# Altium PCB stm32f103.PcbDoc (part 2 of 2)
Units mm, origin at the board's own origin, x right, y up, seen from the top; angles counter-clockwise.
Board outline 73.39 x 86.21 mm, 2 copper layers (Top Layer, Bottom Layer); 96 components, 127 nets, 522 pads, 347 vias.
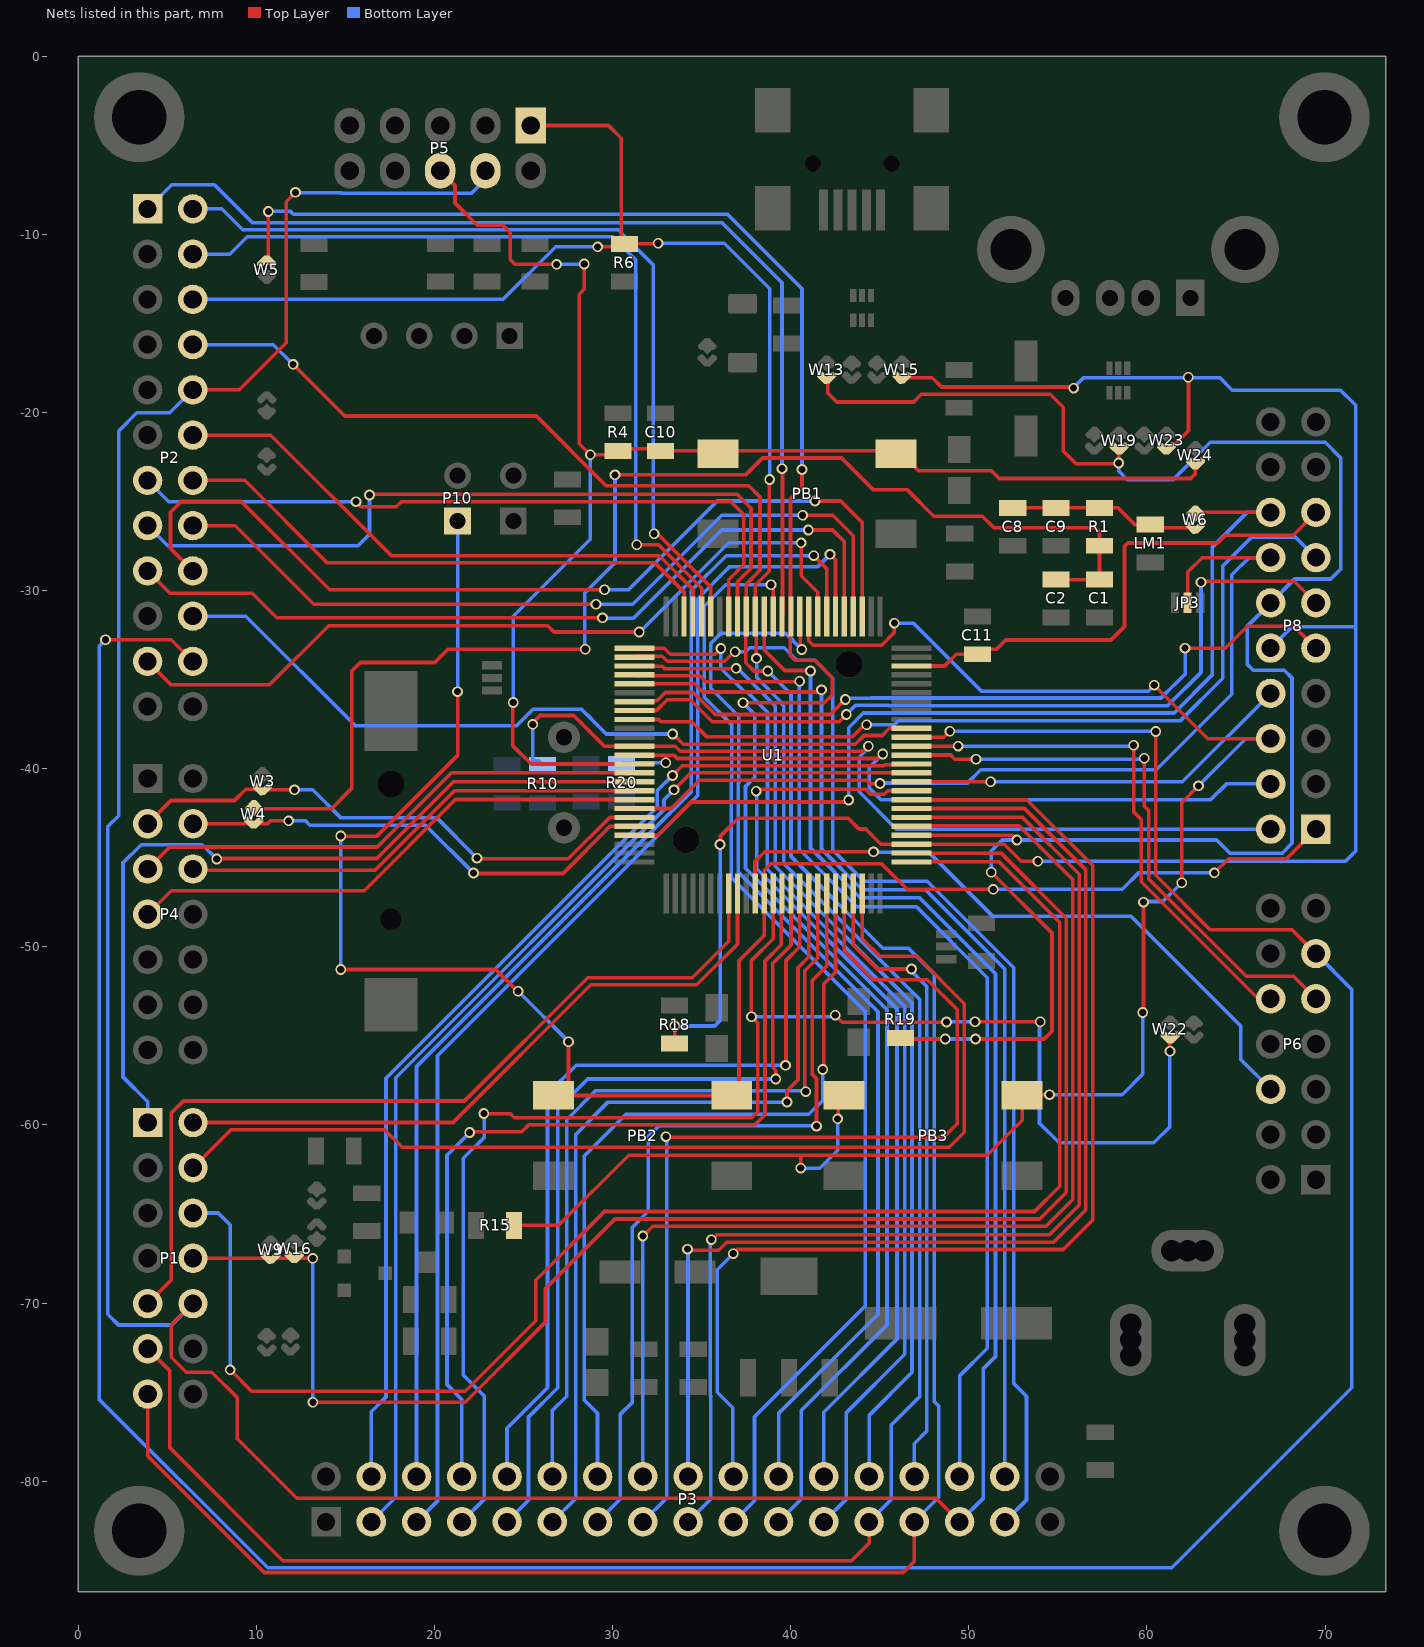
[diagram p2: the nets of this part, all layers, seen from the top]

## Via types
v1: diameter 0.6, hole 0.4, Top Layer to Bottom Layer, tented both sides, 320 vias
v2: diameter 0.6, hole 0.4, Top Layer to Bottom Layer, 27 vias

## Nets (pads, with @x,y where several pads share a name; then routed paths per layer and width w, separated by ;. In a path a pad name is that pad's centre, name@x,y a point inside that pad or via, vN(x,y) a via of type N, cw(c..) or ccw(c..) an arc to the next point about the centre after c; other vN are vias at no path point) (continued)
PB1: P6.6 U1.36 | length 37.6
  Top Layer w0.203: U1.36@37.994,-47.007 37.994,-45.214 38.54,-44.668 v1(44.643,-44.668)
  Bottom Layer w0.203: v1(44.643,-44.668) 44.674,-44.699 47.761,-44.699 51.353,-48.292 59.113,-48.292 65.254,-54.432 65.254,-56.308 P6.6@66.942,-57.996
PB2: P8.1 P10.1 PB2.1 PB2.2 U1.37 | length 102.6
  Top Layer w0.203: v2(14.746,-51.272) 23.446,-51.272 v1@24.683,-52.509 ; v2(14.746,-43.783) 16.773,-43.783 21.301,-39.255 v2(21.301,-35.676) ; PB2.1@26.692,-58.342 PB2.2@36.692,-58.342 37.158,-57.876 37.099,-57.817 37.099,-50.779 38.515,-49.363 U1.37@38.515,-47.011 38.515,-45.703 38.881,-45.337 45.101,-45.337 46.539,-46.775 51.353,-46.775 51.367,-46.761 v1(51.367,-46.775) ; PB2.1@27.527,-57.819 v1(27.527,-55.324) ; v1(63.783,-45.848) 64.582,-45.049 67.827,-45.049 P8.1@69.482,-43.394
  Bottom Layer w0.203: v2(14.746,-51.272) v2(14.746,-43.783) ; v2(21.301,-35.676) P10.1@21.301,-26.093 ; v1(24.702,-52.49) 27.527,-55.315 v1(27.527,-55.324) ; v1(51.367,-46.775) 58.611,-46.775 59.554,-45.832 63.767,-45.832 v1(63.783,-45.848)
PB3: P1.10 P2.10 P3.29 P5.4 U1.89 | length 199.7
  Top Layer w0.203: P2.10@6.439,-18.736 9.045,-18.736 11.687,-16.094 11.687,-8.17 v2(12.207,-7.65) ; P1.10@6.449,-70.022 5.237,-71.234 5.237,-73.037 6.071,-73.871 7.5,-73.871 8.93,-75.301 8.93,-77.608 12.275,-80.953 48.158,-80.953 P3.29@49.479,-82.274 ; U1.89@38.515,-31.461 38.515,-33.336 39.669,-34.49 41.082,-34.49 v1(41.11,-34.518)
  Bottom Layer w0.203: P2.10@6.439,-18.736 5.147,-20.028 3.299,-20.028 2.277,-21.05 2.277,-42.634 1.664,-43.247 1.664,-70.627 2.264,-71.227 5.244,-71.227 P1.10@6.449,-70.022 ; v2@12.207,-7.681 14.761,-7.681 14.785,-7.706 22.087,-7.706 22.868,-6.925 P5.4@22.868,-6.439 ; v1(41.11,-34.518) 41.11,-44.451 43.911,-47.252 47.232,-47.252 51.495,-51.515 51.495,-72.994 50.818,-73.671 50.818,-80.935 P3.29@49.479,-82.274
PB4: P1.11 P2.6 P3.25 P5.1 R6.1 U1.90 | length 170.1
  Top Layer w0.203: P1.11@3.909,-72.562 5.155,-73.808 5.155,-78.124 11.49,-84.459 43.412,-84.459 44.399,-83.472 P3.25@44.399,-82.274 ; P5.1@25.408,-3.899 29.768,-3.899 30.486,-4.617 R6.1@30.486,-10.357 ; v1(29.161,-10.706) 30.137,-10.706 R6.1@30.486,-10.357 ; v1(32.558,-10.508) 32.558,-10.539 R6.1@30.671,-10.539 30.489,-10.357 R6.1@30.486,-10.357 ; v1(38.085,-33.809) 38.058,-33.782 38.058,-31.504 U1.90@38.015,-31.461 38.015,-29.703 38.802,-28.916 38.802,-23.771 v1(38.82,-23.771)
  Bottom Layer w0.203: P2.6@6.439,-13.656 23.855,-13.656 26.805,-10.706 v1(29.161,-10.706) ; v1(32.558,-10.508) 36.27,-10.508 38.82,-13.058 v1(38.82,-23.771) ; v1(38.085,-33.809) 38.085,-34.87 39.534,-36.319 39.534,-36.396 39.607,-36.469 39.607,-45.322 47.239,-52.954 47.239,-75.241 45.634,-76.846 45.634,-81.039 P3.25@44.399,-82.274
PB5: P1.13 P2.8 P3.27 U1.91 | length 151.3
  Top Layer w0.203: P1.13@3.909,-75.102 3.909,-78.576 10.453,-85.12 46.321,-85.12 46.939,-84.502 P3.27@46.939,-82.274 ; v1(12.069,-17.303) 14.97,-20.204 25.726,-20.204 29.635,-24.113 37.645,-24.113 38.28,-24.748 38.28,-28.868 37.515,-29.633 U1.91@37.515,-31.461 37.483,-31.493 37.483,-34.058 37.94,-34.515 v1(38.713,-34.515)
  Bottom Layer w0.203: P2.8@6.439,-16.196 10.962,-16.196 v1(12.069,-17.303) ; v1(38.713,-34.515) 40.014,-35.816 40.014,-44.929 45.162,-50.077 46.613,-50.077 48.055,-51.519 48.055,-75.519 48.312,-75.776 48.312,-80.901 P3.27@46.939,-82.274
PB6: P2.15 U1.92 | length 43.5
  Top Layer w0.203: v1@16.358,-24.605 36.994,-24.605 37.771,-25.382 37.771,-28.753 37.015,-29.509 U1.92@37.015,-31.461
  Bottom Layer w0.203: P2.15@3.899,-26.356 5.032,-27.489 15.715,-27.489 16.358,-26.846 v1(16.358,-24.637)
PB7: P2.13 U1.93 | length 40.6
  Top Layer w0.203: v1(15.599,-25.01) 15.882,-25.293 17.853,-25.293 18.136,-25.01 36.651,-25.01 37.368,-25.727 37.368,-28.54 36.515,-29.393 U1.93@36.515,-31.461
  Bottom Layer w0.203: P2.13@3.899,-23.816 5.093,-25.01 v1(15.599,-25.01)
PB8: P2.2 U1.95 | length 48.1
  Top Layer w0.203: v1(32.333,-26.811) 32.528,-26.811 35.515,-29.798 U1.95@35.515,-31.461
  Bottom Layer w0.203: P2.2@6.439,-8.576 8.064,-8.576 9.242,-9.754 30.316,-9.754 32.287,-11.725 v1@32.287,-26.588
PB9: P2.4 U1.96 | length 48.1
  Top Layer w0.203: v1(31.356,-27.43) 32.577,-27.43 35.015,-29.868 U1.96@35.015,-31.461
  Bottom Layer w0.203: P2.4@6.439,-11.116 8.517,-11.116 9.494,-10.139 29.996,-10.139 31.293,-11.436 31.293,-27.367 v1(31.356,-27.43)
PB10: P3.28 U1.47 | length 35.9
  Top Layer w0.203: U1.47@43.515,-47.011 43.515,-49.904 44.855,-51.244 v1(46.78,-51.244)
  Bottom Layer w0.203: v1(46.78,-51.244) 46.78,-51.365 47.642,-52.227 47.642,-77.182 46.939,-77.885 P3.28@46.939,-79.734
PB11: P1.4 U1.48 | length 61.9
  Top Layer w0.203: P1.4@6.449,-62.402 8.586,-60.265 17.203,-60.265 18.193,-61.255 48.899,-61.255 49.747,-60.407 49.747,-53.196 47.07,-50.519 44.989,-50.519 44.015,-49.545 U1.48@44.015,-47.011
PB12: P1.6 U1.51 | length 88.2
  Top Layer w0.203: v1(8.536,-73.746) 9.732,-74.942 21.736,-74.942 25.684,-70.994 25.684,-68.721 29.549,-64.856 53.688,-64.856 55.098,-63.446 55.098,-48.638 51.673,-45.213 46.813,-45.213 U1.51@46.79,-45.236
  Bottom Layer w0.203: P1.6@6.449,-64.942 7.868,-64.942 8.536,-65.61 v1(8.536,-73.746)
PB13: P1.8 U1.52 W9.1 W16.1 | length 88.7
  Top Layer w0.203: P1.8@6.449,-67.482 6.452,-67.485 v1(13.169,-67.485) ; v1(13.176,-75.564) 21.735,-75.564 26.24,-71.059 26.24,-69.182 30.143,-65.279 53.972,-65.279 55.466,-63.785 55.466,-48.399 51.803,-44.736 U1.52@46.79,-44.736
  Bottom Layer w0.203: v1(13.169,-67.485) 13.176,-67.492 v1(13.176,-75.564)
PB14: P8.10 R18.2 U1.53 W15.1 W23.1 | length 112.9
  Top Layer w0.203: R18.2@33.482,-55.42 33.482,-54.453 v1(33.495,-54.44) ; v1(36.036,-44.254) 36.043,-44.254 36.059,-44.238 36.059,-43.78 37.053,-42.786 43.237,-42.786 43.838,-43.387 44.213,-43.387 45.062,-44.236 U1.53@46.79,-44.236 51.982,-44.236 52.94,-45.194 v1(53.876,-45.194) ; W15.1@46.044,-18.056 W15.1@46.45,-18.056 47.95,-18.056 48.471,-18.577 55.824,-18.577 v1(55.884,-18.637) ; W23.1@61.298,-22.033 61.324,-22.033 62.333,-21.024 62.333,-18.042 v1(62.315,-18.024)
  Bottom Layer w0.203: v1(33.495,-54.44) 35.735,-54.44 36.036,-54.139 v1(36.036,-44.254) ; v1(53.876,-45.194) 71.138,-45.194 71.713,-44.619 71.713,-32.032 ; v1(55.884,-18.637) 55.884,-18.603 56.431,-18.056 64.096,-18.056 64.791,-18.751 70.858,-18.751 71.713,-19.606 71.713,-32.032 ; P8.10@66.942,-33.234 68.144,-32.032 71.713,-32.032
PB15: P8.12 R19.2 U1.54 W13.1 W19.1 | length 107
  Top Layer w0.203: W13.1@41.824,-18.056 41.926,-18.056 42.087,-18.217 42.087,-18.912 42.593,-19.418 46.906,-19.418 47.335,-18.989 54.576,-18.989 55.302,-19.715 55.302,-22.172 56.013,-22.883 v1@58.407,-22.883 ; R19.2@46.159,-55.118 46.211,-55.17 v1(48.678,-55.17) ; U1.54@46.79,-43.736 52.431,-43.736 v1(52.696,-44.001) ; v1(50.374,-55.17) 54.235,-55.17 54.665,-54.74 54.665,-49.223 51.258,-45.815 v1(51.255,-45.815) ; W19.1@58.245,-22.036 58.421,-22.212 v1@58.421,-22.822
  Bottom Layer w0.203: v1(48.678,-55.17) v1(50.374,-55.17) ; v1(51.255,-45.815) 51.255,-44.623 51.877,-44.001 v1(52.696,-44.001) 63.919,-44.001 64.657,-44.739 67.589,-44.739 68.141,-44.187 68.141,-34.904 67.711,-34.474 65.967,-34.474 65.618,-34.125 65.618,-32.018 P8.12@66.942,-30.694 68.284,-29.352 70.32,-29.352 70.866,-28.806 70.866,-22.546 69.999,-21.679 63.556,-21.679 61.457,-23.778 58.899,-23.778 58.407,-23.286 v1(58.407,-22.843)
PC0: P4.5 U1.15 | length 29.5
  Top Layer w0.203: P4.5@3.909,-45.631 5.142,-44.398 16.8,-44.398 20.966,-40.232 U1.15@31.219,-40.232
PC1: P1.1 U1.16 | length 46.4
  Top Layer w0.203: v1(7.781,-45.073) 7.816,-45.038 16.768,-45.038 21.074,-40.732 U1.16@31.219,-40.732
  Bottom Layer w0.203: P1.1@3.909,-59.862 3.909,-58.693 2.519,-57.303 2.519,-45.287 3.544,-44.262 6.97,-44.262 v1(7.781,-45.073)
PC2: P4.6 U1.17 | length 26.7
  Top Layer w0.203: P4.6@6.449,-45.631 6.521,-45.703 16.661,-45.703 21.132,-41.232 U1.17@31.219,-41.232
PC3: P4.7 U1.18 | length 30
  Top Layer w0.203: P4.7@3.909,-48.171 5.233,-46.847 16.059,-46.847 21.174,-41.732 U1.18@31.219,-41.732
PC4: P1.9 U1.33 | length 49.2
  Top Layer w0.203: P1.9@3.909,-70.022 5.234,-68.697 5.234,-59.33 5.913,-58.651 21.685,-58.651 28.606,-51.73 34.467,-51.73 36.515,-49.682 U1.33@36.515,-47.011
PC5: P1.2 U1.34 | length 37.6
  Top Layer w0.203: P1.2@6.449,-59.862 21.045,-59.862 28.773,-52.133 34.73,-52.133 37.015,-49.848 U1.34@37.015,-47.011
PC6: P6.9 U1.63 | length 32.3
  Top Layer w0.203: U1.63@46.769,-39.232 48.97,-39.232 49.205,-39.467 v1(50.403,-39.467) ; v1(59.849,-39.412) 59.849,-42.101 60.088,-42.34 60.088,-46.181 65.564,-51.657 68.223,-51.657 P6.9@69.482,-52.916
  Bottom Layer w0.203: v1(50.403,-39.467) 59.794,-39.467 v1(59.849,-39.412)
PC7: P6.10 U1.64 | length 30.3
  Top Layer w0.203: U1.64@46.769,-38.732 v1(49.4,-38.732) ; v1(59.25,-38.686) 59.247,-38.689 59.247,-42.418 59.685,-42.856 59.685,-46.348 66.253,-52.916 P6.10@66.942,-52.916
  Bottom Layer w0.203: v1(49.4,-38.732) 59.204,-38.732 v1(59.25,-38.686)
PC8: P2.22 P6.11 U1.65 | length 184.6
  Top Layer w0.203: v1(1.539,-32.761) 5.224,-32.761 P2.22@6.439,-33.976 ; U1.65@46.769,-38.232 48.599,-38.232 v1(48.934,-37.897) ; v1(60.493,-37.909) 60.493,-45.986 63.541,-49.034 68.14,-49.034 P6.11@69.482,-50.376
  Bottom Layer w0.203: v1(1.539,-32.761) 1.178,-33.122 1.178,-75.392 10.646,-84.86 61.388,-84.86 71.499,-74.749 71.499,-52.393 P6.11@69.482,-50.376 ; v1(48.934,-37.897) 60.481,-37.897 v1(60.493,-37.909)
PC9: P2.20 U1.66 | length 44.5
  Top Layer w0.203: v1(33.371,-38.054) 33.404,-38.054 33.97,-38.62 43.627,-38.62 44.11,-38.137 45.136,-38.137 45.537,-37.736 U1.66@46.79,-37.736
  Bottom Layer w0.203: P2.20@6.439,-31.436 9.415,-31.436 15.559,-37.58 24.615,-37.58 25.539,-36.656 28.256,-36.656 28.787,-37.187 28.787,-37.191 29.651,-38.054 v1(33.371,-38.054)
PC10: P2.18 U1.78 | length 52.8
  Top Layer w0.203: P2.18@6.439,-28.896 5.185,-27.642 5.185,-25.606 5.792,-24.999 9.164,-24.999 14.123,-29.958 v1(29.544,-29.958) ; v1(41.362,-24.976) 42.815,-24.976 44.015,-26.176 U1.78@44.015,-31.461
  Bottom Layer w0.203: v1(29.544,-29.958) 30.896,-29.958 35.878,-24.976 v1(41.362,-24.976)
PC11: P2.16 U1.79 | length 46
  Top Layer w0.203: P2.16@6.439,-26.356 8.82,-26.356 13.232,-30.768 v1(29.075,-30.768) ; v1(40.67,-25.772) 42.366,-25.772 43.515,-26.921 U1.79@43.515,-31.461
  Bottom Layer w0.203: v1(29.075,-30.768) 31.141,-30.768 36.137,-25.772 v1(40.67,-25.772)
PC12: P2.17 U1.80 | length 46.7
  Top Layer w0.203: P2.17@3.899,-28.896 5.161,-30.158 9.771,-30.158 11.147,-31.534 v1(29.441,-31.534) ; v1(40.993,-26.599) 42.345,-26.599 43.015,-27.269 U1.80@43.015,-31.461
  Bottom Layer w0.203: v1(29.441,-31.534) 29.458,-31.551 31.171,-31.551 36.123,-26.599 v1(40.993,-26.599)
PC13: P8.9 U1.7 | length 42.4
  Top Layer w0.203: U1.7@31.24,-36.236 31.288,-36.188 32.49,-36.188 ; 32.491,-36.188 32.958,-35.721 34.528,-35.721 35.762,-36.955 42.227,-36.955 v1(43.069,-36.113) ; v1(62.137,-33.233) 64.397,-33.233 65.627,-32.003 68.251,-32.003 P8.9@69.482,-33.234
  Bottom Layer w0.203: v1(43.069,-36.113) 43.139,-36.043 44.558,-36.043 44.566,-36.035 60.785,-36.035 61.564,-35.256 61.574,-35.256 62.145,-34.685 v1@62.145,-33.233
PC14: P8.11 U1.8 | length 45.8
  Top Layer w0.203: U1.8@31.24,-36.736 32.464,-36.736 33.076,-36.124 34.361,-36.124 35.595,-37.358 42.728,-37.358 v1(43.125,-36.961) ; v1(63.032,-29.532) 63.093,-29.471 68.259,-29.471 P8.11@69.482,-30.694
  Bottom Layer w0.203: v1@43.097,-36.961 v1(43.125,-36.961) 43.64,-36.446 45.501,-36.446 45.512,-36.457 61.17,-36.457 63.032,-34.595 v1(63.032,-29.532)
PC15: P8.13 U1.9 | length 47.5
  Top Layer w0.203: U1.9@31.24,-37.236 32.596,-37.236 32.725,-37.365 34.451,-37.365 35.303,-38.217 43.46,-38.217 44.142,-37.535 v1(44.265,-37.535)
  Bottom Layer w0.203: v1(44.265,-37.535) 45.815,-37.535 46.031,-37.319 61.852,-37.319 64.252,-34.919 64.252,-28.623 65.882,-26.993 68.321,-26.993 P8.13@69.482,-28.154
PD0: P3.5 U1.81 | length 70.4
  Top Layer w0.203: v1(42.21,-27.97) 42.515,-28.275 U1.81@42.515,-31.461
  Bottom Layer w0.203: P3.5@18.999,-82.274 20.172,-81.101 20.172,-56.115 34.779,-41.508 34.779,-33.793 34.778,-33.791 34.778,-30.455 36.579,-28.654 41.529,-28.654 42.21,-27.973 v1(42.21,-27.97)
PD1: P3.6 U1.82 | length 67.5
  Top Layer w0.203: v1(41.293,-28.039) 42.015,-28.761 U1.82@42.015,-31.461
  Bottom Layer w0.203: P3.6@18.999,-79.734 18.999,-56.718 34.409,-41.308 34.409,-30.016 36.386,-28.039 v1(41.293,-28.039)
PD2: P2.21 U1.83 | length 45.3
  Top Layer w0.203: P2.21@3.899,-33.976 5.218,-35.295 10.749,-35.295 14.065,-31.979 26.368,-31.979 26.719,-32.33 v1(31.5,-32.33) ; v1(40.588,-27.325) 40.588,-29.172 41.515,-30.099 U1.83@41.515,-31.461
  Bottom Layer w0.203: v1(31.5,-32.33) 31.525,-32.33 36.53,-27.325 v1(40.588,-27.325)
PD3: P8.6 PB3.1 PB3.2 R15.1 U1.84 | length 101.8
  Top Layer w0.203: 25.682,-65.623 24.479,-65.623 R15.1@24.463,-65.638 26.958,-65.638 30.902,-61.694 40.562,-61.694 ; v1(40.562,-62.421) 40.562,-61.694 ; U1.84@41.015,-31.461 41.015,-32.826 41.263,-33.074 45.104,-33.074 45.821,-32.357 v1(45.821,-31.831) ; v1(42.634,-59.657) 42.662,-59.629 42.662,-58.673 PB3.1@42.993,-58.342 ; v1(54.531,-58.297) 53.038,-58.297 PB3.2@52.993,-58.342 52.993,-59.731 51.03,-61.694 40.562,-61.694 ; v1(59.765,-53.682) 59.804,-53.643 59.804,-47.572 59.765,-47.533 v1(59.809,-47.489) ; v2(60.409,-35.309) 63.414,-38.314 64.02,-38.314 P8.6@66.942,-38.314 ; v2(61.95,-46.399) 61.95,-41.905 v1(62.89,-40.965)
  Bottom Layer w0.203: v1(40.562,-62.421) 41.636,-62.421 42.634,-61.423 v1(42.634,-59.657) ; v1(45.821,-31.831) 46.898,-31.831 50.713,-35.646 60.072,-35.646 v2(60.409,-35.309) ; v1(54.531,-58.297) 58.611,-58.297 59.765,-57.143 v1(59.765,-53.682) ; v1(59.809,-47.489) 59.84,-47.458 60.891,-47.458 v2(61.95,-46.399) ; v1@62.889,-40.965 65.54,-38.314 P8.6@66.942,-38.314
PD4: P3.22 U1.85 | length 60.7
  Top Layer w0.203: U1.85@40.515,-31.461 40.547,-31.493 40.547,-33.272 40.59,-33.315 40.597,-33.307 v1(40.624,-33.307)
  Bottom Layer w0.203: P3.22@39.319,-79.734 39.319,-76.197 44.9,-70.616 44.9,-53.646 37.058,-45.804 37.058,-40.827 37.085,-40.8 37.085,-37.058 35.516,-35.489 35.516,-33.488 35.514,-33.486 35.514,-32.968 36.095,-32.387 39.704,-32.387 v1(40.624,-33.307) v1@40.681,-33.307
PD5: P3.21 U1.86 W5.1 | length 116.9
  Top Layer w0.203: W5.1@10.386,-11.535 10.41,-11.535 10.678,-11.267 v1(10.678,-8.719) ; v1(37.318,-36.302) 41.89,-36.302 42.334,-35.858 42.334,-34.891 41.359,-33.916 40.246,-33.916 39.974,-33.644 39.974,-31.502 U1.86@40.015,-31.461 39.986,-31.432 39.986,-24.845 40.636,-24.195 v1(40.636,-23.208)
  Bottom Layer w0.203: v1(10.678,-8.719) 11.925,-8.719 12.08,-8.874 36.454,-8.874 40.636,-13.056 v1(40.636,-23.208) ; v1(37.318,-36.302) 37.318,-36.294 37.978,-36.954 37.978,-40.478 37.461,-40.994 37.461,-45.594 45.404,-53.537 45.404,-71.228 40.584,-76.048 40.584,-81.009 P3.21@39.319,-82.274
PD6: P2.1 U1.87 | length 57.2
  Top Layer w0.203: U1.87@39.515,-31.461 39.538,-31.438 39.538,-23.183 v1(39.515,-23.16)
  Bottom Layer w0.203: P2.1@3.899,-8.576 5.26,-7.215 7.652,-7.215 9.79,-9.353 36.148,-9.353 39.515,-12.72 v1(39.515,-23.16)
PD7: P3.19 U1.88 | length 64.3
  Top Layer w0.203: v1(38.893,-29.676) 39.015,-29.798 U1.88@39.015,-31.461
  Bottom Layer w0.203: P3.19@36.779,-82.274 37.967,-81.086 37.967,-76.375 44.175,-70.167 44.175,-53.607 36.655,-46.087 36.655,-40.66 36.682,-40.633 36.682,-37.521 35.147,-35.986 35.147,-33.64 35.146,-33.639 35.146,-30.884 36.354,-29.676 v1(38.893,-29.676)
PD8: P3.16 U1.55 | length 66.8
  Top Layer w0.203: v1(31.7,-66.233) 32.251,-65.682 54.332,-65.682 55.834,-64.18 55.834,-46.222 52.81,-43.198 46.828,-43.198 U1.55@46.79,-43.236
  Bottom Layer w0.203: P3.16@31.699,-79.734 v1(31.7,-66.233)
PD9: P3.17 U1.56 | length 67.1
  Top Layer w0.203: v1(35.548,-66.435) 35.585,-66.435 35.863,-66.157 54.533,-66.157 56.203,-64.487 56.203,-45.928 53.011,-42.736 U1.56@46.79,-42.736
  Bottom Layer w0.203: P3.17@34.239,-82.274 35.504,-81.009 35.504,-75.198 35.475,-75.169 35.475,-66.464 v1@35.504,-66.435
PD10: P3.18 U1.57 | length 66.4
  Top Layer w0.203: v1(34.207,-66.968) 34.276,-67.037 35.955,-67.037 36.407,-66.585 54.751,-66.585 56.571,-64.765 56.571,-45.687 53.12,-42.236 U1.57@46.79,-42.236
  Bottom Layer w0.203: P3.18@34.239,-79.734 v1@34.239,-66.968
PD11: P3.20 U1.58 | length 65.8
  Top Layer w0.203: v1(36.778,-67.22) 37.01,-66.988 55.292,-66.988 56.948,-65.332 56.948,-45.437 53.247,-41.736 U1.58@46.79,-41.736
  Bottom Layer w0.203: P3.20@36.779,-79.734 36.754,-79.709 36.754,-75.878 35.878,-75.002 35.878,-68.12 v1(36.778,-67.22)
PD12: P3.24 U1.59 | length 52.4
  Top Layer w0.203: v1(38.063,-41.258) 38.164,-41.157 44.185,-41.157 44.464,-41.436 45.258,-41.436 45.458,-41.236 U1.59@46.79,-41.236
  Bottom Layer w0.203: v1@38.091,-41.258 38.091,-45.612 45.966,-53.487 45.966,-72.016 41.859,-76.123 P3.24@41.859,-79.734
PD13: P8.8 U1.60 | length 22.2
  Top Layer w0.203: U1.60@46.79,-40.736 v1(51.222,-40.736)
  Bottom Layer w0.203: v1(51.222,-40.736) 61.98,-40.736 P8.8@66.942,-35.774
PD14: P3.3 U1.61 | length 61.9
  Top Layer w0.203: v2(33.446,-41.19) 34.403,-40.233 46.787,-40.233 U1.61@46.79,-40.236
  Bottom Layer w0.203: P3.3@16.459,-82.274 17.832,-80.901 17.832,-57.35 32.891,-42.29 32.891,-41.745 v2(33.446,-41.19)
PD15: P3.4 U1.62 | length 60
  Top Layer w0.203: v2(33.362,-40.382) 33.914,-39.83 45.223,-39.83 45.279,-39.774 46.752,-39.774 U1.62@46.79,-39.736
  Bottom Layer w0.203: P3.4@16.459,-79.734 16.459,-76.098 17.285,-75.272 17.285,-57.376 32.501,-42.16 32.501,-41.243 v2(33.362,-40.382)
PE0: P2.12 U1.97 | length 33.2
  Top Layer w0.203: P2.12@6.439,-21.276 10.821,-21.276 17.59,-28.045 32.622,-28.045 34.515,-29.938 U1.97@34.515,-31.461
PE1: P2.14 U1.98 | length 31.6
  Top Layer w0.203: P2.14@6.439,-23.816 9.361,-23.816 13.993,-28.448 32.386,-28.448 34.015,-30.077 U1.98@34.015,-31.461
PE2: P3.23 U1.1 | length 60.4
  Top Layer w0.203: U1.1@31.24,-33.236 32.902,-33.236 33.239,-33.573 35.759,-33.573 v1(36.081,-33.252)
  Bottom Layer w0.203: v1(36.081,-33.252) 36.081,-34.359 37.402,-35.679 37.546,-35.679 38.696,-36.829 38.696,-41.868 38.689,-41.875 38.689,-45.639 46.395,-53.346 46.395,-72.875 43.109,-76.161 43.109,-81.024 P3.23@41.859,-82.274
PE3: P3.31 U1.2 | length 66.7
  Top Layer w0.203: U1.2@31.24,-33.736 31.288,-33.688 32.783,-33.688 33.072,-33.976 36.29,-33.976 36.832,-33.435 v1(36.881,-33.435)
  Bottom Layer w0.203: v1(36.881,-33.435) 37.482,-33.435 37.709,-33.207 39.638,-33.207 40.347,-33.916 41.359,-33.916 42.368,-34.925 42.368,-44.569 44.115,-46.315 47.667,-46.315 52.524,-51.173 52.524,-74.513 53.238,-75.227 53.238,-81.055 P3.31@52.019,-82.274
PE4: P3.26 U1.3 | length 56.5
  Top Layer w0.203: U1.3@31.24,-34.236 31.261,-34.257 32.782,-34.257 32.905,-34.379 36.738,-34.379 36.882,-34.236 36.939,-34.293 v1(36.939,-34.366)
  Bottom Layer w0.203: v1(36.939,-34.366) 36.939,-34.293 39.131,-36.486 39.131,-45.471 46.81,-53.15 46.81,-73.883 44.419,-76.274 44.419,-79.714 P3.26@44.399,-79.734
PE5: P3.30 U1.4 | length 61
  Top Layer w0.203: U1.4@31.24,-34.736 31.287,-34.783 34.898,-34.783 35.237,-35.122 v1@40.503,-35.122
  Bottom Layer w0.203: v1@40.562,-35.122 40.479,-35.205 40.479,-44.52 43.71,-47.751 47.057,-47.751 51.034,-51.728 51.034,-72.532 49.479,-74.087 P3.30@49.479,-79.734
  other v1: 40.503,-35.092
PE6: P3.32 U1.5 | length 61.3
  Top Layer w0.203: U1.5@31.24,-35.236 34.613,-35.236 35.071,-35.694 v1@41.858,-35.694
  Bottom Layer w0.203: v1(41.732,-35.575) 41.732,-44.503 44.019,-46.79 47.57,-46.79 52.019,-51.238 P3.32@52.019,-79.734
PE7: P3.7 U1.38 W22.1 | length 88.7
  Top Layer w0.203: v1(22.777,-59.36) 24.255,-59.36 24.488,-59.593 37.818,-59.593 38.144,-59.267 38.144,-54.273 v1(37.795,-53.924) 37.795,-50.772 39.015,-49.552 U1.38@39.015,-47.011 ; v1(42.502,-53.835) 42.902,-54.235 42.914,-54.223 v1(48.742,-54.223) ; v1(50.349,-54.204) v1(54.012,-54.204) ; v1(61.287,-55.863) 61.287,-55.315 61.391,-55.211 61.395,-55.211 W22.1@61.515,-55.09
  Bottom Layer w0.203: P3.7@21.539,-82.274 22.789,-81.024 22.789,-75.195 21.626,-74.032 21.626,-61.873 22.789,-60.71 22.789,-59.372 v1(22.777,-59.36) ; v1(37.795,-53.924) 42.385,-53.924 42.399,-53.938 v1(42.502,-53.835) ; v1(48.742,-54.223) 48.761,-54.204 50.533,-54.204 v1(50.349,-54.204) ; v1(54.012,-54.204) 53.964,-54.251 53.964,-59.894 55.069,-60.999 60.384,-60.999 61.287,-60.096 v1(61.287,-55.863)
PE8: P3.8 U1.39 | length 50
  Top Layer w0.203: v1(21.979,-60.422) 21.979,-60.376 24.908,-60.376 25.288,-59.996 37.989,-59.996 38.557,-59.428 38.557,-50.794 39.467,-49.884 39.467,-47.059 U1.39@39.515,-47.011
  Bottom Layer w0.203: P3.8@21.539,-79.734 21.539,-75.404 20.705,-74.57 20.705,-61.696 v1(21.979,-60.422)
PE9: P3.9 U1.40 | length 48.2
  Top Layer w0.203: v1(39.163,-57.415) 39.163,-56.921 38.998,-56.756 38.998,-50.935 40.015,-49.918 U1.40@40.015,-47.011
  Bottom Layer w0.203: P3.9@24.079,-82.274 25.283,-81.07 25.283,-76.387 26.925,-74.745 26.925,-59.104 28.614,-57.415 v1(39.163,-57.415)
PE10: P3.10 U1.41 | length 46.5
  Top Layer w0.203: v1@39.735,-56.668 39.735,-50.768 40.515,-49.988 U1.41@40.515,-47.011
  Bottom Layer w0.203: P3.10@24.079,-79.734 24.079,-77.021 26.349,-74.751 26.349,-58.256 27.962,-56.643 39.575,-56.643 v1@39.714,-56.504
  other v1: 39.713,-56.651
PE11: P3.11 U1.42 | length 47.1
  Top Layer w0.203: v1(39.791,-58.714) 39.791,-58.076 40.407,-57.46 40.407,-51.169 41.015,-50.561 U1.42@41.015,-47.011
  Bottom Layer w0.203: P3.11@26.619,-82.274 27.93,-80.963 27.93,-60.531 29.747,-58.714 v1(39.791,-58.714)
PE12: P3.12 U1.43 | length 45.9
  Top Layer w0.203: v1(40.848,-58.13) 40.796,-58.078 40.796,-51.35 41.515,-50.631 U1.43@41.515,-47.011
  Bottom Layer w0.203: P3.12@26.619,-79.734 26.619,-76.028 27.424,-75.223 27.424,-59.7 29.037,-58.087 40.805,-58.087 v1(40.848,-58.13)
PE13: P3.13 U1.44 | length 46
  Top Layer w0.203: v1(41.45,-60.064) 41.45,-57.388 41.199,-57.138 41.199,-51.899 42.015,-51.083 U1.44@42.015,-47.011
  Bottom Layer w0.203: P3.13@29.159,-82.274 30.424,-81.009 30.424,-76.248 31.115,-75.557 31.115,-67.411 31.098,-67.394 31.098,-65.749 32.006,-64.841 32.006,-60.645 32.6,-60.051 v1@41.45,-60.051
PE14: P3.14 U1.45 | length 44.9
  Top Layer w0.203: v1(41.801,-56.889) 41.849,-56.889 41.849,-52.085 42.515,-51.419 U1.45@42.515,-47.011
  Bottom Layer w0.203: P3.14@29.159,-79.734 29.159,-76.18 28.414,-75.435 28.414,-61.736 30.75,-59.4 41.021,-59.4 41.801,-58.62 v1(41.801,-56.889)
PE15: P3.15 U1.46 | length 56.2
  Top Layer w0.203: v1(32.993,-60.653) 32.993,-60.688 48.58,-60.688 49.344,-59.924 49.344,-53.523 47.667,-51.846 44.628,-51.846 43.015,-50.233 U1.46@43.015,-47.011
  Bottom Layer w0.203: P3.15@31.699,-82.274 33.041,-80.932 v1@33.041,-60.653
PF6: C11.1 P8.15 U1.73 | length 28.9
  Top Layer w0.203: U1.73@46.79,-34.236 48.636,-34.236 49.296,-33.576 C11.1@50.481,-33.576 50.757,-33.299 51.547,-33.299 52.068,-32.778 57.977,-32.778 58.737,-32.018 58.737,-27.509 58.913,-27.333 63.963,-27.333 64.404,-26.892 68.204,-26.892 P8.15@69.482,-25.614
PH0: P8.2 R10.2 U1.12 | length 49.5
  Top Layer w0.203: v2(25.519,-37.514) 25.519,-37.428 25.93,-37.017 27.825,-37.017 29.544,-38.736 U1.12@31.24,-38.736 33.516,-38.736 33.803,-39.023 44.075,-39.023 v1(44.359,-38.739)
  Bottom Layer w0.203: v2(25.519,-37.514) 25.526,-37.521 25.526,-39.564 25.854,-39.564 R10.2@26.076,-39.786 ; v1(44.359,-38.739) 44.359,-38.846 43.842,-39.364 43.842,-41.302 45.934,-43.394 P8.2@66.942,-43.394
PH1: P8.4 R20.2 U1.13 | length 42.5
  Top Layer w0.203: U1.13@31.24,-39.236 32.984,-39.236 ; v2(32.984,-39.669) 32.984,-39.236 ; v1(45.165,-39.172) 44.911,-39.426 33.636,-39.426 33.446,-39.236 32.984,-39.236
  Bottom Layer w0.203: R20.2@30.507,-39.726 30.564,-39.669 v2(32.984,-39.669) ; v1(45.165,-39.172) 44.407,-39.93 44.407,-41.084 45.074,-41.751 63.563,-41.751 64.46,-40.854 P8.4@66.942,-40.854
RESET: C10.2 P5.6 PB1.3 PB1.4 R4.2 U1.14 W24.1 | length 83.3
  Top Layer w0.203: P5.6@20.328,-6.439 21.158,-7.269 21.158,-8.249 22.409,-9.5 23.851,-9.5 24.26,-9.909 24.26,-11.422 24.53,-11.692 v2(26.861,-11.692) ; v2(24.428,-36.284) 24.388,-36.244 24.388,-38.694 25.43,-39.736 U1.14@31.24,-39.736 ; v2(28.415,-11.675) 28.415,-13.074 28.128,-13.361 28.128,-21.755 v1(28.754,-22.381) R4.2@30.358,-22.381 ; R4.2@30.358,-22.144 30.464,-22.039 C10.2@32.791,-22.039 ; C10.2@32.791,-22.276 32.911,-22.155 45.631,-22.155 PB1.3@45.774,-22.298 ; PB1.3@46.201,-22.298 47.189,-23.286 51.288,-23.286 51.71,-23.708 62.455,-23.708 62.698,-23.465 62.698,-23.042 62.697,-23.042 W24.1@62.518,-22.863
  Bottom Layer w0.203: v2(24.428,-36.284) 24.428,-31.443 28.754,-27.117 v1(28.754,-22.381) ; v2(26.861,-11.692) 28.398,-11.692 v2(28.415,-11.675)
VDDA: C8.2 C9.2 LM1.2 R1.2 W6.1 | length 10.5
  Top Layer w0.203: C8.2@52.463,-25.36 C9.2@54.897,-25.36 R1.2@57.331,-25.36 58.37,-25.36 59.306,-26.297 LM1.2@60.183,-26.297 60.36,-26.473 W6.1@62.518,-26.473
VDDAO: P8.16 U1.22 W6.2 | length 54
  Top Layer w0.203: U1.22@31.24,-43.736 32.538,-43.736 34.407,-41.867 v1@43.237,-41.867 ; W6.2@62.71,-25.614 P8.16@66.942,-25.614
  Bottom Layer w0.203: v1(43.253,-41.759) 43.253,-37.696 44.078,-36.871 61.524,-36.871 63.653,-34.742 63.653,-27.579 65.618,-25.614 P8.16@66.942,-25.614
VREF+: P4.4 U1.21 W4.1 | length 27.2
  Top Layer w0.203: P4.4@6.449,-43.091 10.631,-43.091 10.795,-42.927 v1(11.817,-42.927) ; v2(22.193,-45.858) 22.193,-45.883 27.215,-45.883 29.862,-43.236 U1.21@31.24,-43.236
  Bottom Layer w0.203: v1(11.817,-42.927) 12.77,-42.927 13.01,-43.167 19.502,-43.167 v2(22.193,-45.858)
VREF++: C1.2 C2.2 R1.1 W4.2 | length 70.9
  Top Layer w0.203: W4.2@10.047,-42.242 14.223,-42.242 15.352,-41.113 15.352,-34.526 15.836,-34.042 20.017,-34.042 20.761,-33.298 v1(28.466,-33.298) ; v1(30.138,-23.509) 37.464,-23.509 38.415,-22.558 42.849,-22.558 44.644,-24.353 46.558,-24.353 48.027,-25.822 50.755,-25.822 51.41,-26.477 57.126,-26.477 57.331,-26.682 R1.1@57.331,-27.481 C1.2@57.331,-29.384 C2.2@54.897,-29.384
  Bottom Layer w0.203: v1@28.439,-33.298 28.439,-30.134 30.138,-28.435 v1(30.138,-23.509)
VREF-: P4.3 U1.20 W3.1 | length 30.9
  Top Layer w0.203: P4.3@3.909,-43.091 5.217,-41.783 8.78,-41.783 9.41,-41.153 9.879,-41.153 9.913,-41.187 v1(12.15,-41.187) ; W3.1@10.152,-41.146 W3.1@10.384,-41.146 ; v2(22.394,-45.022) 22.431,-45.059 27.518,-45.059 29.841,-42.736 U1.20@31.24,-42.736
  Bottom Layer w0.203: v1(12.15,-41.187) 13.17,-41.187 14.727,-42.744 20.116,-42.744 v2(22.394,-45.022)
VSSAO: JP3.2 P8.14 U1.19 | length 51.9
  Top Layer w0.203: U1.19@31.24,-42.236 33.295,-42.236 34.875,-40.656 44.254,-40.656 44.446,-40.848 44.995,-40.848 v1(45.009,-40.834) ; JP3.2@62.289,-30.3 62.289,-28.962 63.097,-28.154 P8.14@66.942,-28.154
  Bottom Layer w0.203: v1(45.009,-40.834) 45.042,-40.801 49.92,-40.801 50.667,-40.054 60.527,-40.054 64.762,-35.819 64.762,-29.112 65.72,-28.154 P8.14@66.942,-28.154
pads on no net: BT1. D2.0 J1.MH1 J1.MH2 M1.0 M2.0 M3.0 M4.0 P4.10

## Polygon pours and split planes (outlines as drawn)
GND on Top Layer "GND" (solid, remove dead copper, pour order 4): 0,-84.517 0,0 73.392,0 73.392,-86.209 0,-86.209
GND on Bottom Layer "GND" (solid, remove dead copper, pour order 5): 0,-84.517 0,0 73.392,0 73.392,-86.209 0,-86.209

## Keep-outs
Keep-Out Layer:
  lines w0.15: 0,-86.209 0,-84.517 0,-7.106 0,-0.254 0,0 22.562,0 73.138,0 73.392,0 73.392,-10.861 73.392,-83.741 73.392,-86.209 28.566,-86.209 0,-86.209

## Other copper
Top Layer:
  rectangle net 3V3: 32.393,-72.755 41.504,-67.782
  rectangle net 3V3: 30.683,-72.785 35.896,-70.191
  rectangle net 3V3: 38.979,-75.203 40.727,-70.327
  rectangle net 5V: 55.588,-78.178 61.932,-69.499
  rectangle net 5V: 41.918,-75.714 48.84,-69.695
  rectangle net 5V: 41.805,-76.015 56.928,-73.081
  rectangle net 5V: 53.431,-80.754 56.149,-75.245
  rectangle net 5V: 71.126,-77.107 72.715,-76.334
  region net 5V: 67.278,-17.793 67.278,-16.204 66.505,-16.204 66.505,-17.793
  rectangle net 5V: 22.788,-72.808 23.396,-71.501
  rectangle net GND: 29.151,-37.27 29.818,-36.016
Bottom Layer:
  rectangle net 5V: 71.123,-77.102 72.71,-76.33
  region net 5V: 67.273,-17.796 67.273,-16.209 66.501,-16.209 66.501,-17.796
  rectangle net 5V: 17.44,-33.669 18.727,-33.042

## Silkscreen, mask and mechanical layers (free items; w line width, h text height)
Top Overlay:
  circle w0.5: c62.196,-83.559 r0.255
  region: 62.246,-82.359 62.246,-81.559 60.696,-81.559 60.696,-82.359
  rectangle: 62.846,-84.559 63.646,-82.959
  region: 60.712,-84.577 61.343,-84.084 59.397,-81.594 58.766,-82.086
  rectangle: 60.696,-84.559 61.496,-81.559
  rectangle: 58.596,-84.559 59.396,-81.559
  lines w0.8: 62.246,-81.959 cw(c62.246,-82.959) 63.246,-82.959
  text "PA13" at 20.075,-0.197 h0.64 r270
  text "PA14" at 17.395,-0.216 h0.64 r270
  text "PA15" at 22.516,-0.216 h0.64 r270
  text "PB4" at 24.998,-0.628 h0.64 r270
  text "RST" at 20.138,-7.908 h0.64 r270
  text "PB3" at 22.668,-7.922 h0.64 r270
  text "GND" at 25.22,-7.921 h0.64 r270
  text "GND" at 17.456,-8.022 h0.64 r270
  text "PD6" at 0.567,-8.849 h0.64
  text "PD8" at 7.939,-8.868 h0.64
  text "PB9" at 7.918,-11.382 h0.64
  text "PD5" at 0.522,-11.529 h0.64
  text "PB4" at 7.918,-13.94 h0.64
  text "PA10" at 0.196,-14.016 h0.64
  text "PA9" at 0.611,-16.562 h0.64
  text "PB5" at 7.939,-16.562 h0.64
  text "PA12" at 0.157,-18.995 h0.64
  text "PB3" at 7.939,-19.033 h0.64
  text "GND" at 71.02,-20.821 h0.64
  text "5V" at 64.267,-20.856 h0.64
  text "PE0" at 7.961,-21.547 h0.64
  text "PA11" at 0.285,-21.743 h0.64
  text "3.3V" at 63.372,-23.346 h0.64
  text "RST" at 70.954,-23.386 h0.64
  text "PB7" at 0.565,-24.119 h0.64
  text "PE1" at 7.961,-24.169 h0.64
  text "PF6" at 70.987,-25.832 h0.64
  text "VDD" at 63.719,-25.935 h0.64
  text "PB6" at 0.5,-26.763 h0.64
  text "PC11" at 7.983,-26.792 h0.64
  text "PC15" at 70.923,-28.315 h0.64
  text "VSS" at 63.658,-28.457 h0.64
  text "PC12" at 0.167,-29.263 h0.64
  text "PC10" at 7.961,-29.241 h0.64
  text "PC14" at 70.982,-30.891 h0.64
  text "PB15" at 63.374,-31.061 h0.64
  text "3.3V" at 0.208,-31.692 h0.64
  text "PC9" at 7.983,-31.798 h0.64
  text "PB14" at 63.223,-33.442 h0.64
  text "PC13" at 70.982,-33.496 h0.64
  text "PD2" at 0.586,-34.349 h0.64
  text "PC8" at 7.983,-34.355 h0.64
  text "PA15" at 70.923,-36.013 h0.64
  text "PD13" at 63.17,-36.026 h0.64
  text "GND" at 0.651,-36.906 h0.64
  text "5V" at 7.983,-36.913 h0.64
  text "PA14" at 70.953,-38.618 h0.64
  text "PD3" at 63.479,-38.65 h0.64
  text "PA5" at 8.078,-40.832 h0.64
  text "PA4" at 0.543,-40.984 h0.64
  text "PA13" at 70.953,-41.046 h0.64
  text "PH1" at 63.856,-41.072 h0.64
  text "Vref" at 0.256,-43.621 h0.64
  text "PH0" at 63.748,-43.75 h0.64
  text "PB2" at 71.002,-43.764 h0.64
  text "Vref+" at 7.933,-44.026 h0.64
  text "PC0" at 0.599,-46.066 h0.64
  text "PC2" at 8.15,-46.076 h0.64
  text "GND" at 71.009,-47.934 h0.64
  text "5V" at 64.249,-47.992 h0.64
  text "PA0" at 8.006,-48.413 h0.64
  text "PC3" at 0.643,-48.509 h0.64
  text "3.3V" at 63.156,-50.661 h0.64
  text "PC8" at 71.009,-50.692 h0.64
  text "PA3" at 0.614,-51.099 h0.64
  text "PC7" at 63.647,-53.11 h0.64
  text "PC6" at 71.002,-53.24 h0.64
  text "3.3V" at 8.025,-53.512 h0.64
  text "GND" at 0.67,-53.687 h0.64
  text "PA12" at 70.985,-55.703 h0.64
  text "PA6" at 63.717,-55.747 h0.64
  text "5V" at 8.15,-56.089 h0.64
  text "GND" at 0.732,-56.176 h0.64
  text "PA10" at 71.015,-58.249 h0.64
  text "PB1" at 63.717,-58.278 h0.64
  text "PC5" at 8.078,-60.142 h0.64
  text "PC1" at 0.581,-60.274 h0.64
  text "PA9" at 71.015,-60.795 h0.64
  text "PB0" at 63.54,-60.869 h0.64
  text "PB11" at 8.03,-62.669 h0.64
  text "PA1" at 0.599,-62.793 h0.64
  text "PA7" at 63.554,-63.37 h0.64
  text "PA8" at 71,-63.356 h0.64
  text "PA2" at 0.522,-65.381 h0.64
  text "PB12" at 8.006,-65.363 h0.64
  text "PB13" at 7.909,-67.675 h0.64
  text "PA7" at 0.655,-67.794 h0.64
  text "PB3" at 7.956,-70.357 h0.64
  text "PC4" at 0.552,-70.414 h0.64
  text "PB4" at 0.658,-72.992 h0.64
  text "PB5" at 0.492,-75.506 h0.64
  text "GND" at 8,-75.538 h0.64
  text "PE10" at 23.86,-75.869 h0.64 r270
  text "3.3V" at 13.598,-75.889 h0.64 r270
  text "PD15" at 16.231,-75.889 h0.64 r270
  text "PE12" at 26.3,-75.947 h0.64 r270
  text "PE14" at 28.779,-75.927 h0.64 r270
  text "PD10" at 33.968,-75.927 h0.64 r270
  text "PD12" at 41.442,-75.927 h0.64 r270
  text "PB10" at 46.709,-76.005 h0.64 r270
  text "PE8" at 21.324,-76.082 h0.64 r270
  text "PD11" at 36.446,-76.102 h0.64 r270
  text "PD4" at 39.04,-76.257 h0.64 r270
  text "PE4" at 44.133,-76.276 h0.64 r270
  text "PD8" at 31.373,-76.315 h0.64 r270
  text "PD1" at 18.613,-76.353 h0.64 r270
  text "PE5" at 49.148,-76.334 h0.64 r270
  text "PE6" at 51.723,-76.353 h0.64 r270
  text "5V" at 54.183,-77.07 h0.64 r270
  text "PE7" at 21.285,-83.75 h0.64 r270
  text "PD0" at 18.729,-83.789 h0.64 r270
  text "PE9" at 23.763,-83.789 h0.64 r270
  text "PE11" at 26.416,-83.789 h0.64 r270
  text "PD5" at 39.099,-83.789 h0.64 r270
  text "PE2" at 41.558,-83.789 h0.64 r270
  text "PB3" at 49.167,-83.789 h0.64 r270
  text "GND" at 54.376,-83.789 h0.64 r270
  text "PE13" at 28.836,-83.808 h0.64 r270
  text "PE15" at 31.353,-83.808 h0.64 r270
  text "PD9" at 33.967,-83.808 h0.64 r270
  text "PD7" at 36.523,-83.808 h0.64 r270
  text "PD14" at 16.212,-83.827 h0.64 r270
  text "PB4" at 44.094,-83.828 h0.64 r270
  text "PB5" at 46.534,-83.828 h0.64 r270
  text "PE3" at 51.684,-83.828 h0.64 r270
  text "GND" at 13.734,-84.04 h0.64 r270

## Text inside footprints (layer, text, board x,y; h text height)
J1: Mechanical 1 "PCB Edge" at 47.486,-0.347 h0.25 r180
P1: Top Overlay "13" at 3.464,-76.671 h0.76 r270; Top Overlay "14" at 6.066,-76.862 h0.76 r270; Top Overlay "1" at 3.366,-57.907 h0.76 r270; Top Overlay "2" at 6.153,-57.527 h0.76 r270
P2: Top Overlay "1" at 3.408,-6.551 h0.76 r270; Top Overlay "2" at 6.069,-6.297 h0.76 r270
P3: Top Overlay "1" at 11.895,-82.664 h0.76; Top Overlay "2" at 11.651,-80.046 h0.76
P4: Top Overlay "1" at 3.45,-38.522 h0.76 r270; Top Overlay "2" at 6.196,-38.268 h0.76 r270
P5: Top Overlay "10" at 12.472,-6.815 h0.76; Top Overlay "9" at 12.93,-4.064 h0.76; Top Overlay "1" at 27.274,-4.228 h0.76; Top Overlay "2" at 27.241,-6.782 h0.76
P6: Top Overlay "1" at 69.884,-65.171 h0.76 r90; Top Overlay "2" at 67.435,-65.425 h0.76 r90
P8: Top Overlay "2" at 66.675,-45.026 h0.76 r270; Top Overlay "1" at 69.335,-45.152 h0.76 r270; Top Overlay "19" at 69.42,-17.489 h0.76 r270; Top Overlay "20" at 66.548,-17.574 h0.76 r270